# Altium PCB Counter_PickUp_v2.PcbDoc
Units mm, origin at the board's own origin, x right, y up, seen from the top; angles counter-clockwise.
Board outline 35 x 42 mm, 2 copper layers (Top Layer, Top, Bottom Layer, Bottom), stack 1.571 mm thick; 23 components, 12 nets, 63 pads, 6 vias.
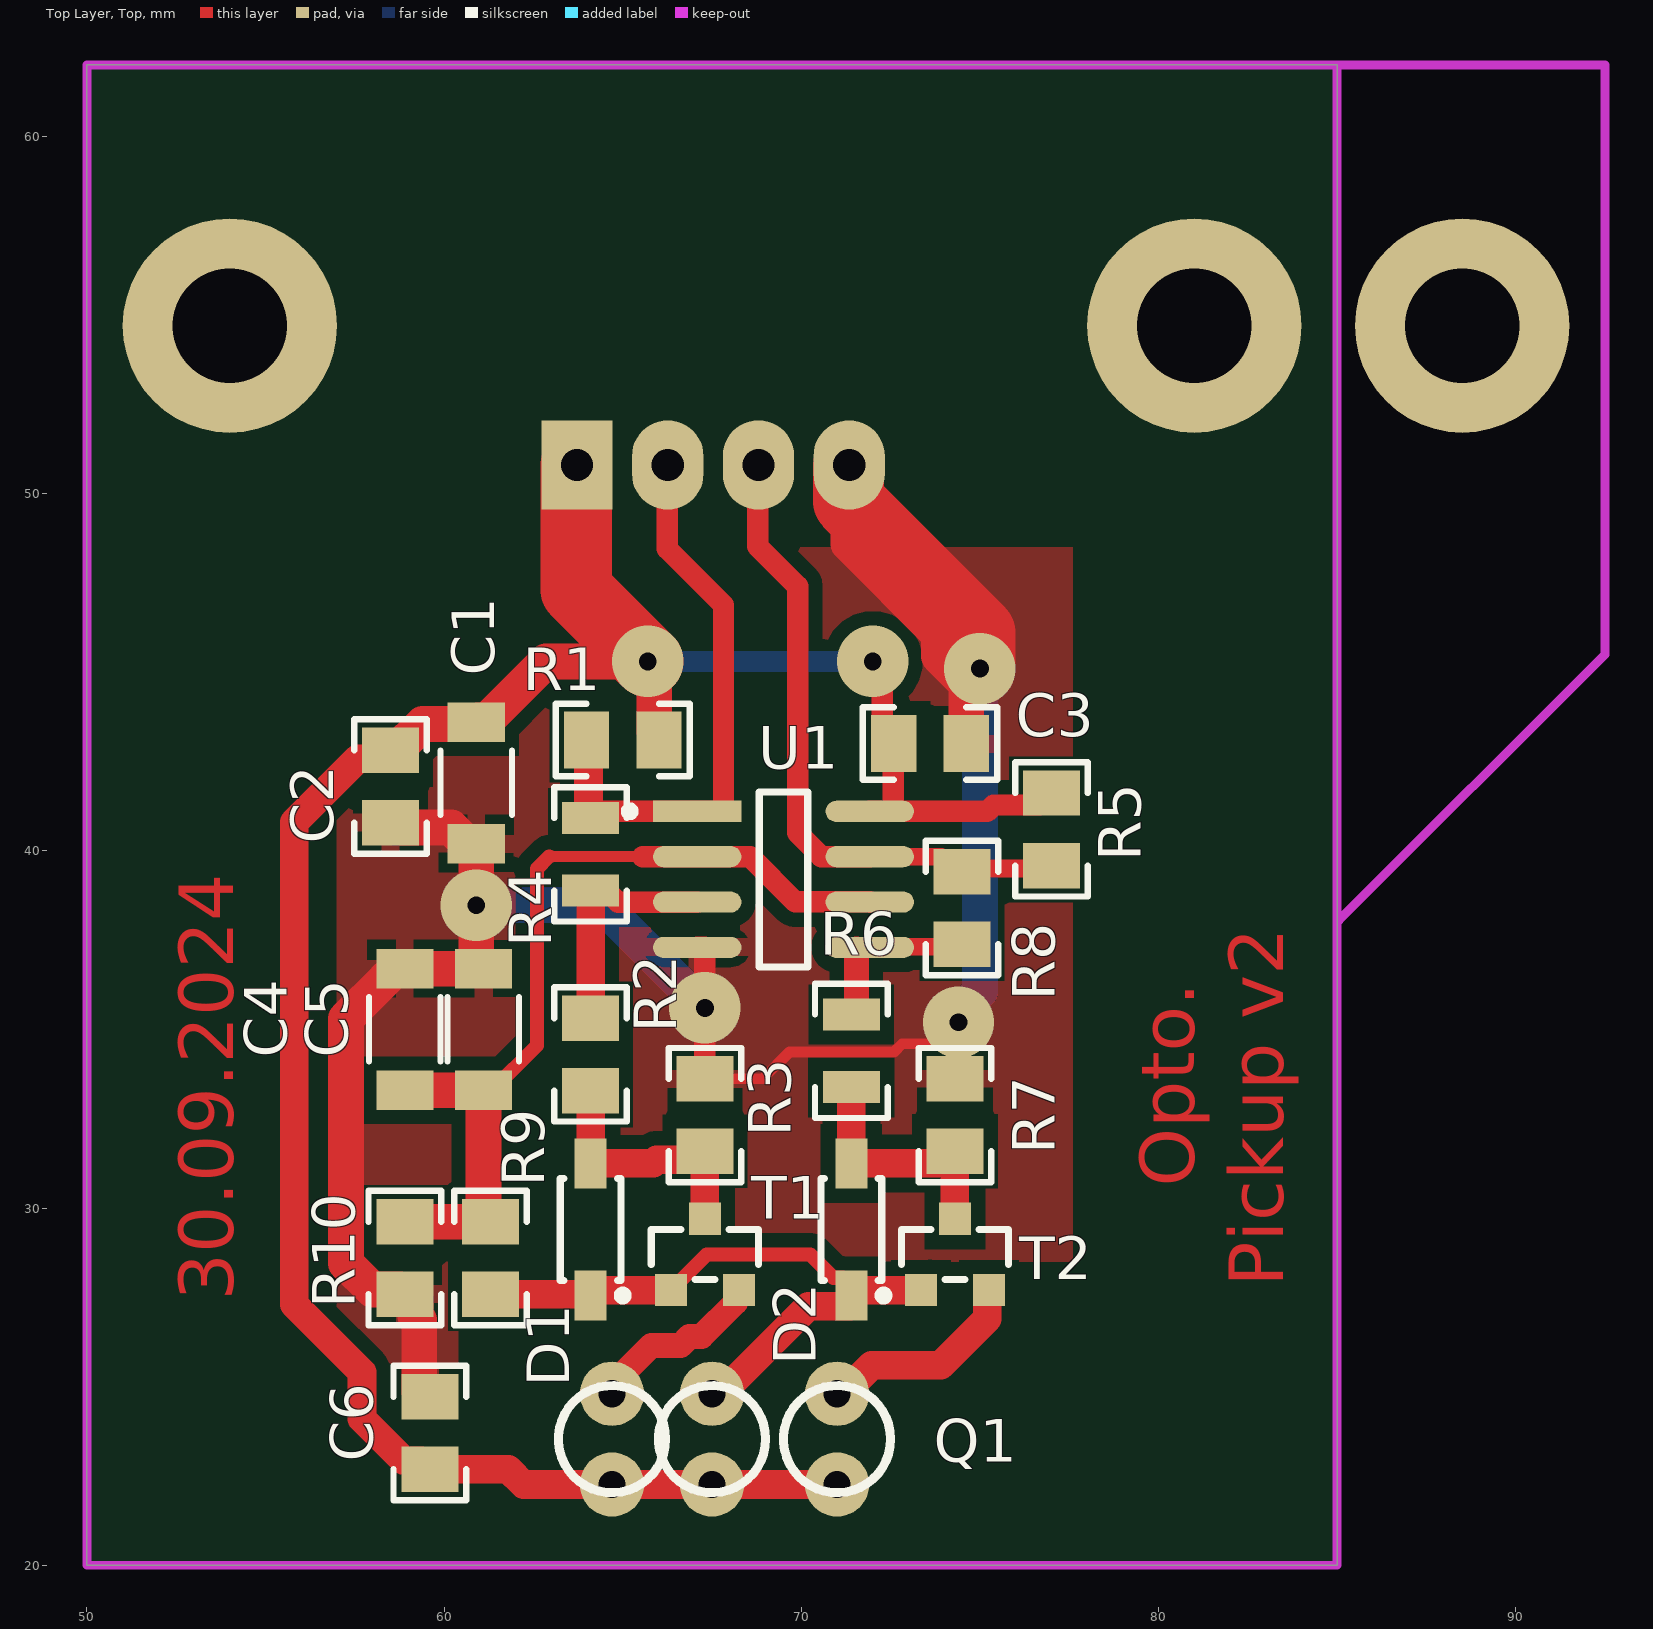
[diagram p0: Top Layer, Top view]
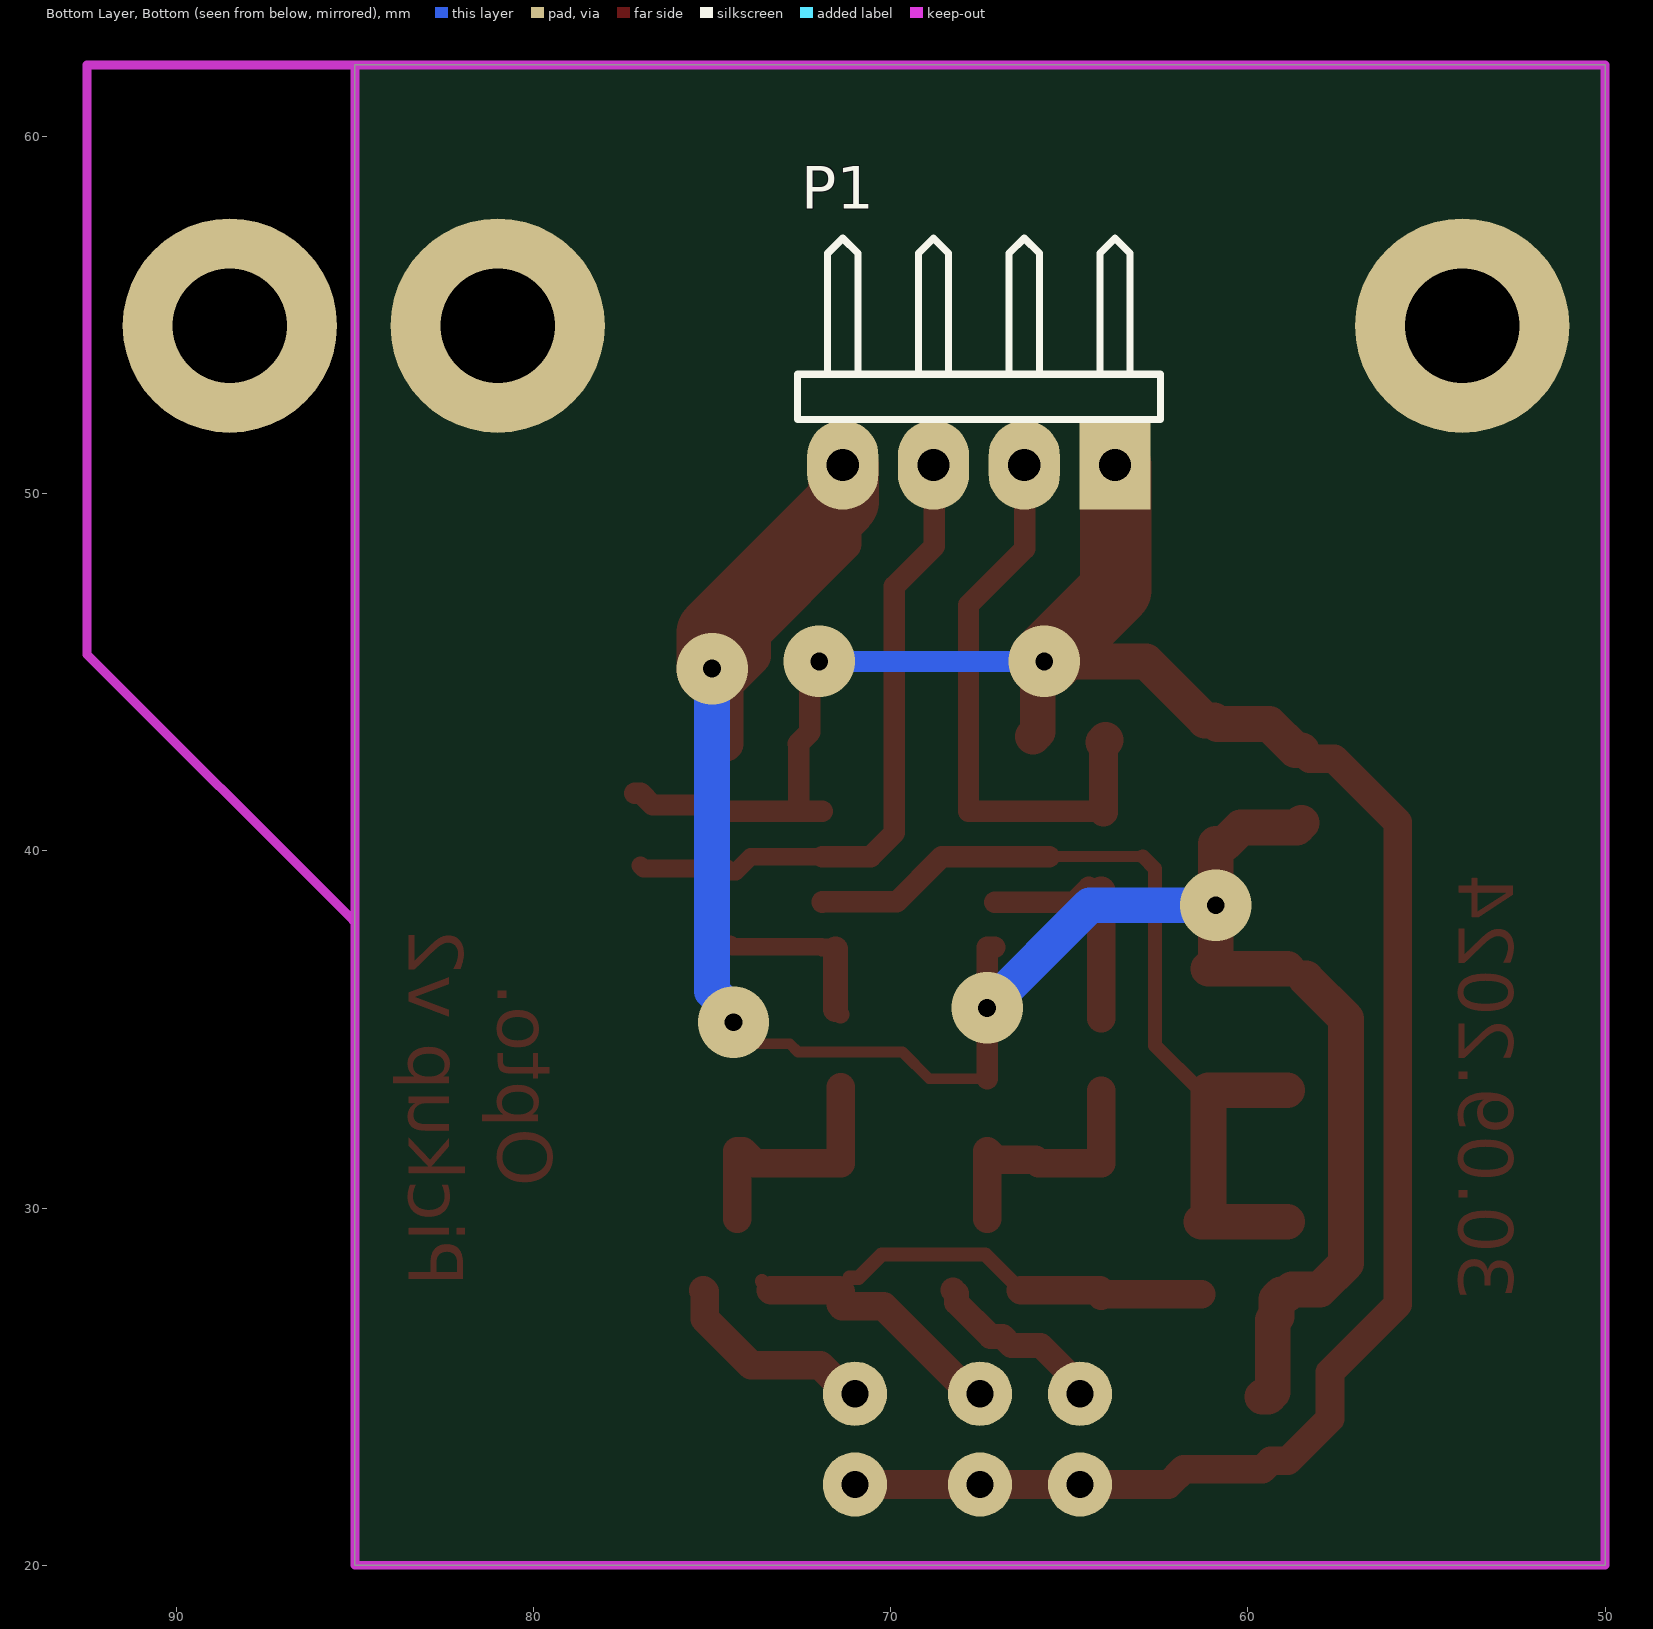
[diagram p1: Bottom Layer, Bottom view, seen from below]

## Layer stack, top to bottom
Top Solder, Top Mask: solder mask 0.0102, Solder Resist, Dk 3.5
Top Layer, Top: signal copper 0.0356
Dielectric 1: dielectric 1.5, FR-4, Dk 4.8
Bottom Layer, Bottom: signal copper 0.0356
Bottom Solder, Bot Mask: solder mask 0.0102, Solder Resist, Dk 3.5

## Board outline
50,20 50,62 85,62 85,20

## Design rules (kind name [scope] priority, off if disabled: settings)
BoardOutlineClearance [All] p1 off: gap=0.2 ignorepadtopadclearanceinfootprint=FALSE except(0.4: Arc-SplitBarrior Arc-SplitContinuation Track-SplitBarrior Track-SplitContinuation SMDPad-SplitBarrior SMDPad-SplitContinuation THPad-SplitBarrior THPad-SplitContinuation Via-SplitBarrior Via-SplitContinuation Fill-SplitBarrior Fill-SplitContinuation Poly-SplitBarrior Poly-SplitContinuation Region-SplitBarrior Region-SplitContinuation Text-SplitBarrior Text-SplitContinuation)
Clearance [All] p1: gap=0.35 ignorepadtopadclearanceinfootprint=FALSE
ComponentClearance [All] p1: gap=0.254 collisioncheckmode=3 verticalgap=0 showdistances=FALSE donotcheckwithout3dbody=TRUE
Height [All] p1: minheight=0 maxheight=125.4 prefheight=12.7
HoleSize [All] p1: absolutevalues=TRUE maxlimit=6.3 minlimit=0.2 maxpercent=80.000 minpercent=20.000
MinimumAnnularRing [All] p1: minimumring=0.076
MinimumSolderMaskSliver [All] p1: minsoldermaskwidth=0.01
PolygonConnect PolygonConnect_1 [All] p1: thpad.connectstyle=Relief thpad.reliefconductorwidth=0.508 thpad.reliefentries=4 thpad.polygonreliefangle="90 Angle" thpad.airgapwidth=0.254 smdpad.connectstyle=Relief smdpad.reliefconductorwidth=0.508 smdpad.reliefentries=4 smdpad.polygonreliefangle="90 Angle" smdpad.airgapwidth=0.254 via.connectstyle=Direct via.reliefconductorwidth=0.508 via.reliefentries=4 via.polygonreliefangle="90 Angle" via.airgapwidth=0.254
RoutingCorners [All] p1: cornerstyle=Round minsetback=2.54 maxsetback=2.54
RoutingVias [All] p1: holewidth=0.5 width=1 viastyle="Through Hole" minholewidth=0.2 minwidth=0.45 maxholewidth=3.5 maxwidth=6.5
SilkToSilkClearance [All] p1 off: silktosilkclearance=0.01
SilkToSolderMaskClearance [IsPad] p1 off: minsilkscreentomaskgap=0.01 clearancetoexposedcopper=TRUE
SolderMaskExpansion [All] p1: expansion=0.102 istentingtop=FALSE
Width [All] p1: maxlimit=2.54 minlimit=0.089 preferedwidth=0.381
23 further rules are at their usual default settings.

## Components (designator, comment, footprint, x,y, rotation, side; value= is the part's Value field where it differs from the comment)
C1 "" 1206_180 60.9,41.9 r270 top value=10uF
C2 "" 0805_HV#1 58.5,41.8 r90 top value=100n
C3 "" 0805_HV#1 73.6,43 r180 top value=100n
C4 "" 1206_180 58.9,35 r90 top value=10uF
C5 "" 1206_180 61.1,35 r90 top value=10uF
C6 "" 0805_HV#1 59.6,23.7 r270 top value=100n
D1 "BAT46W-7-F" SOD-123-2_V 64.1,29.4 r270 top
D2 "BAT46W-7-F" SOD-123-2_V 71.4,29.4 r270 top
P1 "Header 4H" HDR1X4H 63.72,50.8 r0 bottom
Q1 "Photo_T" Photo_T 67.52,23.53 r180 top
R1 "" 0805_HV#1 65,43.1 r180 top value=4,7k
R2 "" 0805_HV#1 64.1,34.3 r90 top value=1k
R3 "" 0805_HV#1 67.3,32.6 r90 top value=100k
R4 "" 0805_HV#2 64.1,39.9 r270 top value=2,2M
R5 "" 0805_HV#1 77,40.6 r270 top value=4,7k
R6 "" 0805_HV#2 71.4,34.4 r90 top value=1k
R7 "" 0805_HV#1 74.3,32.6 r90 top value=100k
R8 "" 0805_HV#1 74.5,38.4 r270 top value=2,2M
R9 "" 0805_HV#1 61.3,28.6 r270 top value=220
R10 "" 0805_HV#1 58.9,28.6 r90 top value=220
T1 "BC807-25,215" SOT23_0 67.3,28.7 r0 top
T2 "BC807-25,215" SOT23_0 74.3,28.7 r0 top
U1 "LM393D" SO8_IPC_A 69.5,39.2 r0 top

## Footprints (in the part's own frame and the unit in brackets; to place one, negate y for a bottom-side part, rotate by r counter-clockwise, add the part's x,y. Pads: shape width x height; smd on the part's side, far side on the other; paste and mask are expansions set on the pad)
0805_HV#1 [mil]
  rect 50x63 smd: 1(-40,0) 2(40,0)
  silkscreen extent -74,-40 74,40, body extent -43,-29 43,29, height 57
0805_HV#2 [mil]
  rect 35.43x63 smd: 1(-40,0) 2(40,0)
  silkscreen extent -74,-40 74,40, body extent -43,-29 43,29, height 57
1206_180 [mm]
  rect 1.1x1.6 smd: 1(-1.7,0) 2(1.7,0)
  silkscreen extent -0.9,-1 0.9,1, body extent -1.75,-0.95 1.75,0.95, height 1.9
HDR1X4H [mm] "Connector; Header; 4 Position; Right Angle"
  rect 2x2.5 hole 0.9: 1(0,0)
  oval 2x2.5 hole 0.9: 2(2.54,0) 3(5.08,0) 4(7.62,0)
  silkscreen extent -1.27,-6.35 8.89,-1.27
Photo_T [mm]
  round 1.8 hole 0.762: 1(0.02,1.27) 2(0.02,-1.27) 3(2.82,-1.27) 4(2.82,1.27) 5(-3.48,-1.27) 6(-3.48,1.27)
  silkscreen extent -4.98,-1.5 4.32,1.5
SO8_IPC_A [mm]
  rect 2.474x0.592 smd paste+0 mask+0: 1(-2.416,1.905)
  rrect100% 2.474x0.592 smd paste+0 mask+0: 2(-2.416,0.635) 3(-2.416,-0.635) 4(-2.416,-1.905) 5(2.416,-1.905) 6(2.416,-0.635) 7(2.416,0.635) 8(2.416,1.905)
  silkscreen extent -4.43,-2.45 0.68,2.45, body extent -4.15,-2.95 4.15,2.95, height 0.25
SOD-123-2_V [mm] "SOD-123, 2-Leads, Body 2.85x1.7mm (max), Pitch 3.7mm"
  rect 1.4x0.9 smd: 1(-1.85,0) 2(1.85,0)
  silkscreen extent -1.43,-0.85 1.97,1.03, body extent -1.42,-0.85 1.43,0.85, height 1.45
SOT23_0 [mm]
  rect 0.9x0.9 smd paste-1000 mask+0: 1(-0.95,-1) 2(0.95,-1) 3(0,1)
  silkscreen extent -1.5,-0.7 1.5,0.7, body extent -1.65,-1.5 1.65,1.5, height 0.25

## Part data
C1 C4 C5: library part C1206, "CAP, CERM, NP0, 1206", TempCo=X7R, Tolerance_%=10, Value1=50V, MountType=SMT, PackageReference=1206, SizeArea_mm2=5.12, SizeAreaWB_mm2=10.92, SizeX_mm=3.2, SizeY_mm=1.6, SizeZ_mm=1.8, TaMax_C=125, TaMin_C=-55, Technology=Ceramic
C2 C3 C6: library part C0805, "CAP, CERM, +/- 10%, X7S,  0805", TempCo=X7S, Tolerance_%=10, Value1=25V, CompType=Capacitor, MountType=SMT, PackageReference=0805, SizeArea_mm2=2.5, SizeAreaWB_mm2=6.75, SizeX_mm=2, SizeY_mm=1.25, SizeZ_mm=1.45, Technology=Ceramic
D1 D2: "Surface Mount Schottky Barrier Diode, 100 V, -55 to 125 degC, 2-Pin SOD123, RoHS, Tape and Reel", Manufacturer="Diodes Inc", Operating Temperature="-55 to 125 degC", ComponentLink1Description="Manufacturer URL", ComponentLink1URL=http://www.diodes.com/, ComponentLink2Description=Datasheet, ComponentLink2URL=http://diodes.com/datasheets/ds30044.pdf, ComponentLink3Description="Package Specification", ComponentLink3URL=http://diodes.com/datasheets/ds30044.pdf, CT@1 V="12 pF Typ.", DatasheetVersion="Rev. 16-2", IR@1.5 V="0.3 uA Max.", Mounting Technology="Surface Mount", PackageDescription="2-Pin SMD, Body 2.7 x 1.55 mm, Height 1.45 mm", Packing="Tape and Reel", PartNumber=BAT46W-7-F, RoHS=TRUE, V(BR)R="100 V Min.", VF@10 mA="0.45 V Max."
P1: "Header, 4-Pin, Right Angle", LatestRevisionDate=17-Jul-2002, LatestRevisionNote="Re-released for DXP Platform.", Publisher="Altium Limited"
R1 R2 R3 R4 R5 R6 R7 R8 R9 R10: library part R0805, "RES, 1%, 0.1 W, 0805", Value1=1%, MountType=SMT, PackageReference=0805, SizeX_mm=2, SizeY_mm=1.25, SizeZ_mm=0.75

## Free pads (board coordinates)
  round 6 hole 3.2: 2(54,54.7) 2(81,54.7) 2(88.5,54.7)

## Via types
v1: diameter 2, hole 0.5, Top Layer, Top to Bottom Layer, Bottom, 6 vias

## Nets (pads, with @x,y where several pads share a name; then routed paths per layer and width w, separated by ;. In a path a pad name is that pad's centre, name@x,y a point inside that pad or via, vN(x,y) a via of type N, cw(c..) or ccw(c..) an arc to the next point about the centre after c; other vN are vias at no path point)
5V: C1.1 C2.2 C3.2 C6.2 P1.1 Q1.1 Q1.4 Q1.6 R1.1 R5.1 U1.8 | length 67.5
  Top Layer, Top w0.6: U1.8 U1.8@72.567,41.105 ; v1(72,45.3) 72.268,45.032 72.268,43.316 C3.2 72.571,42.987 72.571,41.109 U1.8@72.567,41.105 ; R5.1@77.165,41.616 R5.1 76.665,41.281 75.381,41.281 75.205,41.105 U1.8@72.567,41.105
  Top Layer, Top w0.8: C2.2 58.265,42.581 57.581,42.581 55.8,40.8 55.8,27.3 57.7,25.4 57.7,24.1 58.881,22.919 59.365,22.919 C6.2 61.8,22.684 62.224,22.26 Q1.4 Q1.1 Q1.6@70.335,22.26
  Top Layer, Top w1: C2.2 58.665,42.816 59.399,43.55 60.85,43.55 C1.1 60.95,43.65 61.2,43.65 62.85,45.3 v1(65.7,45.3) ; v1@65.6,45.2 65.881,44.919 65.881,43.335 R1.1@66.016,43.2
  Top Layer, Top w2: P1.1@63.7,50.8 63.7,47.3 v1(65.7,45.3)
  Bottom Layer, Bottom w0.6: v1@65.808,45.192 v1(65.7,45.3) v1(72,45.3)
GND: C1.2 C2.1 C3.1 C4.2 C5.2 C6.1 P1.4 R3.2 R7.2 R10.1 U1.4 | length 67.4
  Top Layer, Top w0.3: R3.2 68.916,33.616 69.669,34.369 72.597,34.369 72.828,34.6 v1@74.124,34.6
  Top Layer, Top w0.5: C4.2@58.375,36.425 58.65,36.7 C4.2
  Top Layer, Top w0.6: U1.4 67.296,37.295 67.3,37.291 v1(67.3,35.6) R3.2
  Top Layer, Top w1: C4.2@58.375,36.425 57.25,35.3 57.25,28.455 57.986,27.719 58.765,27.719 R10.1 59.065,27.584 59.2,27.449 59.2,26.963 59.3,26.863 59.3,24.851 59.435,24.716 C6.1 ; C2.1 58.635,40.649 60.201,40.649 60.65,40.2 C1.2 v1(60.9,38.475) 60.9,36.75 C5.2@60.95,36.7 ; C4.2 C5.2@60.95,36.7 ; C5.2 C5.2@60.95,36.7 ; P1.4@71.32,49.78 71.32,48.596 73.85,46.066 73.85,45.45 v1@74.481,44.819 ; C3.1 74.616,44.716 v1(75,45.1)
  Top Layer, Top w2: P1.4@71.32,50.78 71.32,49.78 71.912,49.188 74.442,46.658 75,46.1 v1(75,45.1)
  Bottom Layer, Bottom w1: v1(60.9,38.475) 64.425,38.475 v1(67.3,35.6) ; v1(74.4,35.2) 74.4,35.471 75,36.071 v1(75,45.1)
NetC4_1: C4.1 C5.1 R9.1 R10.2 U1.2 U1.6 | length 25.3
  Top Layer, Top w0.3: 62.939,39.839 65.561,39.839
  Top Layer, Top w0.4: C5.1 61.35,33.3 62.6,34.55 62.6,39.5 62.939,39.839
  Top Layer, Top w0.6: 65.561,39.839 67.08,39.839 67.088,39.831 68.569,39.831 69.831,38.569 71.912,38.569 U1.6
  Top Layer, Top w1: R10.2 R9.1@61.235,29.616 ; C4.1 C5.1 61.1,29.751 R9.1@61.235,29.616 ; R9.1 R9.1@61.235,29.616
NetD1_1: D1.1 R2.1 R3.1 T1.3 | length 7.3
  Top Layer, Top w0.8: R2.1 D1.1 65.85,31.25 65.949,31.349 67.065,31.349 R3.1 T1.3
NetD1_2: D1.2 D2.2 Q1.2 R9.2 T1.1 T2.1 | length 18.2
  Top Layer, Top w0.4: T1.1 67.35,28.7 70.25,28.7 70.9,28.05 D2.2@71.15,28.05 ; T2.1 T2.1@73.6,27.95
  Top Layer, Top w0.8: R9.2 D1.2@64.1,27.584 ; D1.2 64.1,27.65 64.15,27.7 T1.1 ; Q1.2@67.535,24.8 67.751,24.8 70.201,27.25 71.35,27.25 71.4,27.3 D2.2 71.4,27.65 71.45,27.7 T2.1
NetD2_1: D2.1 R6.1 R7.1 T2.3 | length 7.1
  Top Layer, Top w0.8: R6.1 D2.1 73.801,31.25 74.135,31.584 R7.1 T2.3
NetP1_2: P1.2 R1.2 R4.1 U1.1 | length 16.3
  Top Layer, Top w0.6: R4.1@64.1,41.016 64.185,41.101 67.08,41.101 U1.1 67.796,41.105 67.8,41.109 67.82,41.109 67.82,46.88 66.24,48.46 P1.2@66.24,50.8
  Top Layer, Top w0.8: R4.1@64.042,41.074 64.042,43.042 R1.2@64.042,43.142
  Top Layer, Top w1: R1.2 R1.2@64.042,43.042
NetP1_3: P1.3 R5.2 R8.1 U1.7 | length 18.4
  Top Layer, Top w0.5: U1.7 73.916,39.835 74.335,39.416 R8.1 74.584,39.5 76.916,39.5 R5.2
  Top Layer, Top w0.6: P1.3@68.78,50.8 68.78,48.52 69.9,47.4 69.9,40.5 70.561,39.839 71.912,39.839 U1.7
NetQ1_3: Q1.3 T1.2 | length 5
  Top Layer, Top w0.7: Q1.3@64.735,24.8 64.735,25.085 65.8,26.15 66.622,26.15 66.872,26.4 67.2,26.4 68.15,27.35 68.15,27.6 T1.2
NetQ1_5: Q1.5 T2.2 | length 5.9
  Top Layer, Top w0.8: Q1.5 71.169,24.8 71.969,25.6 73.9,25.6 75.2,26.9 75.2,27.65 T2.2
NetR2_2: R2.2 R4.2 U1.3 | length 6.4
  Top Layer, Top w0.6: R4.2@64.45,38.984 64.869,38.565 U1.3
  Top Layer, Top w0.8: R2.2 R4.2
NetR6_2: R6.2 R8.2 U1.5 | length 4.9
  Top Layer, Top w0.5: R6.2 R6.2@71.543,35.559 ; U1.5@71.543,37.252 71.585,37.295 U1.5 71.934,37.313 74.429,37.313 R8.2
  Top Layer, Top w0.7: R6.2@71.543,35.559 U1.5@71.543,37.252

## Polygon pours and split planes (outlines as drawn)
GND on Top Layer, Top "NONET_L01_P-001" (solid, remove dead copper, pour order 0): 73.9,27.9 60.4,27.9 60.4,24.693 60.082,24.364 57,24.35 57,48.5 77.6,48.5 77.6,28.5 73.9,28.5

## Keep-outs
Keep-Out Layer, Board:
  lines w0.25: 85.05,38.05 92.5,45.5 92.5,62 85,62 ; 85,62 50,62 50,20 85,20 85,62

## Other copper
Top Layer, Top:
  text "Opto." at 80.992,30.6 h1.52 r90
  text "Pickup v2" at 83.492,27.8 h1.52 r90
  text "30.09.2024" at 54.1,27.4 h1.52 r90